# Allegro board sensor_board_place_repl.brd
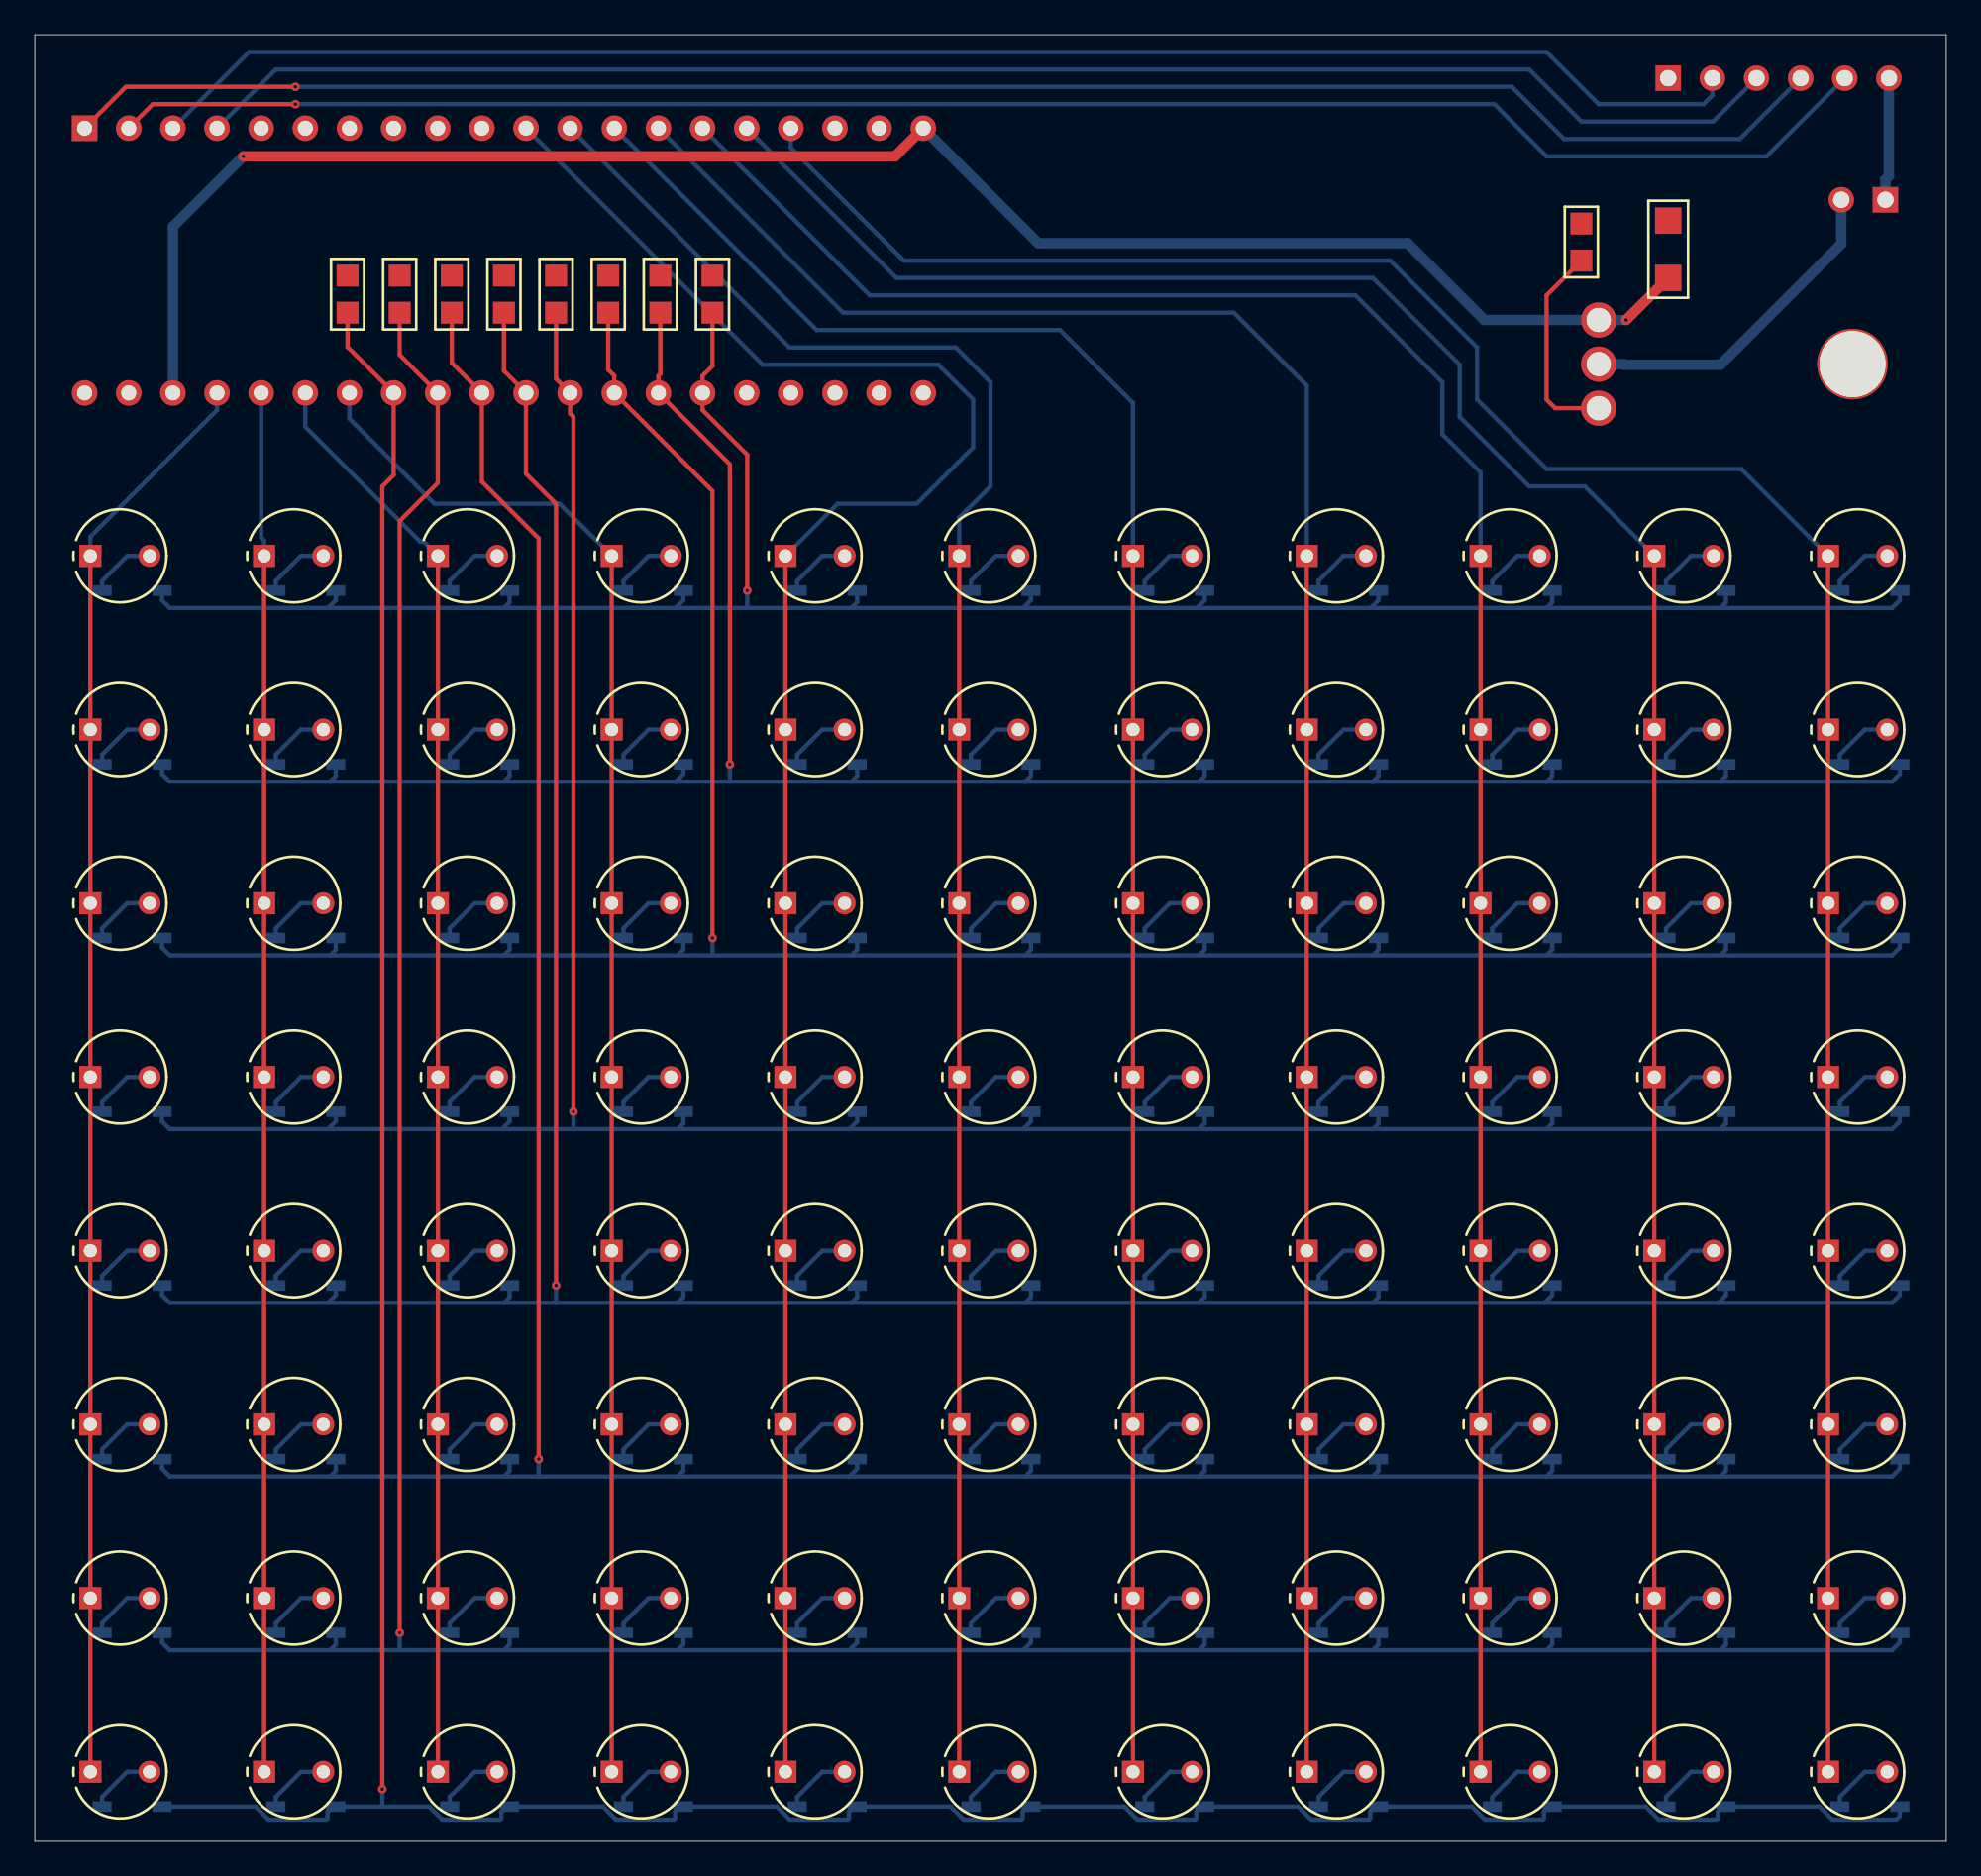
[diagram p0: board, top side]
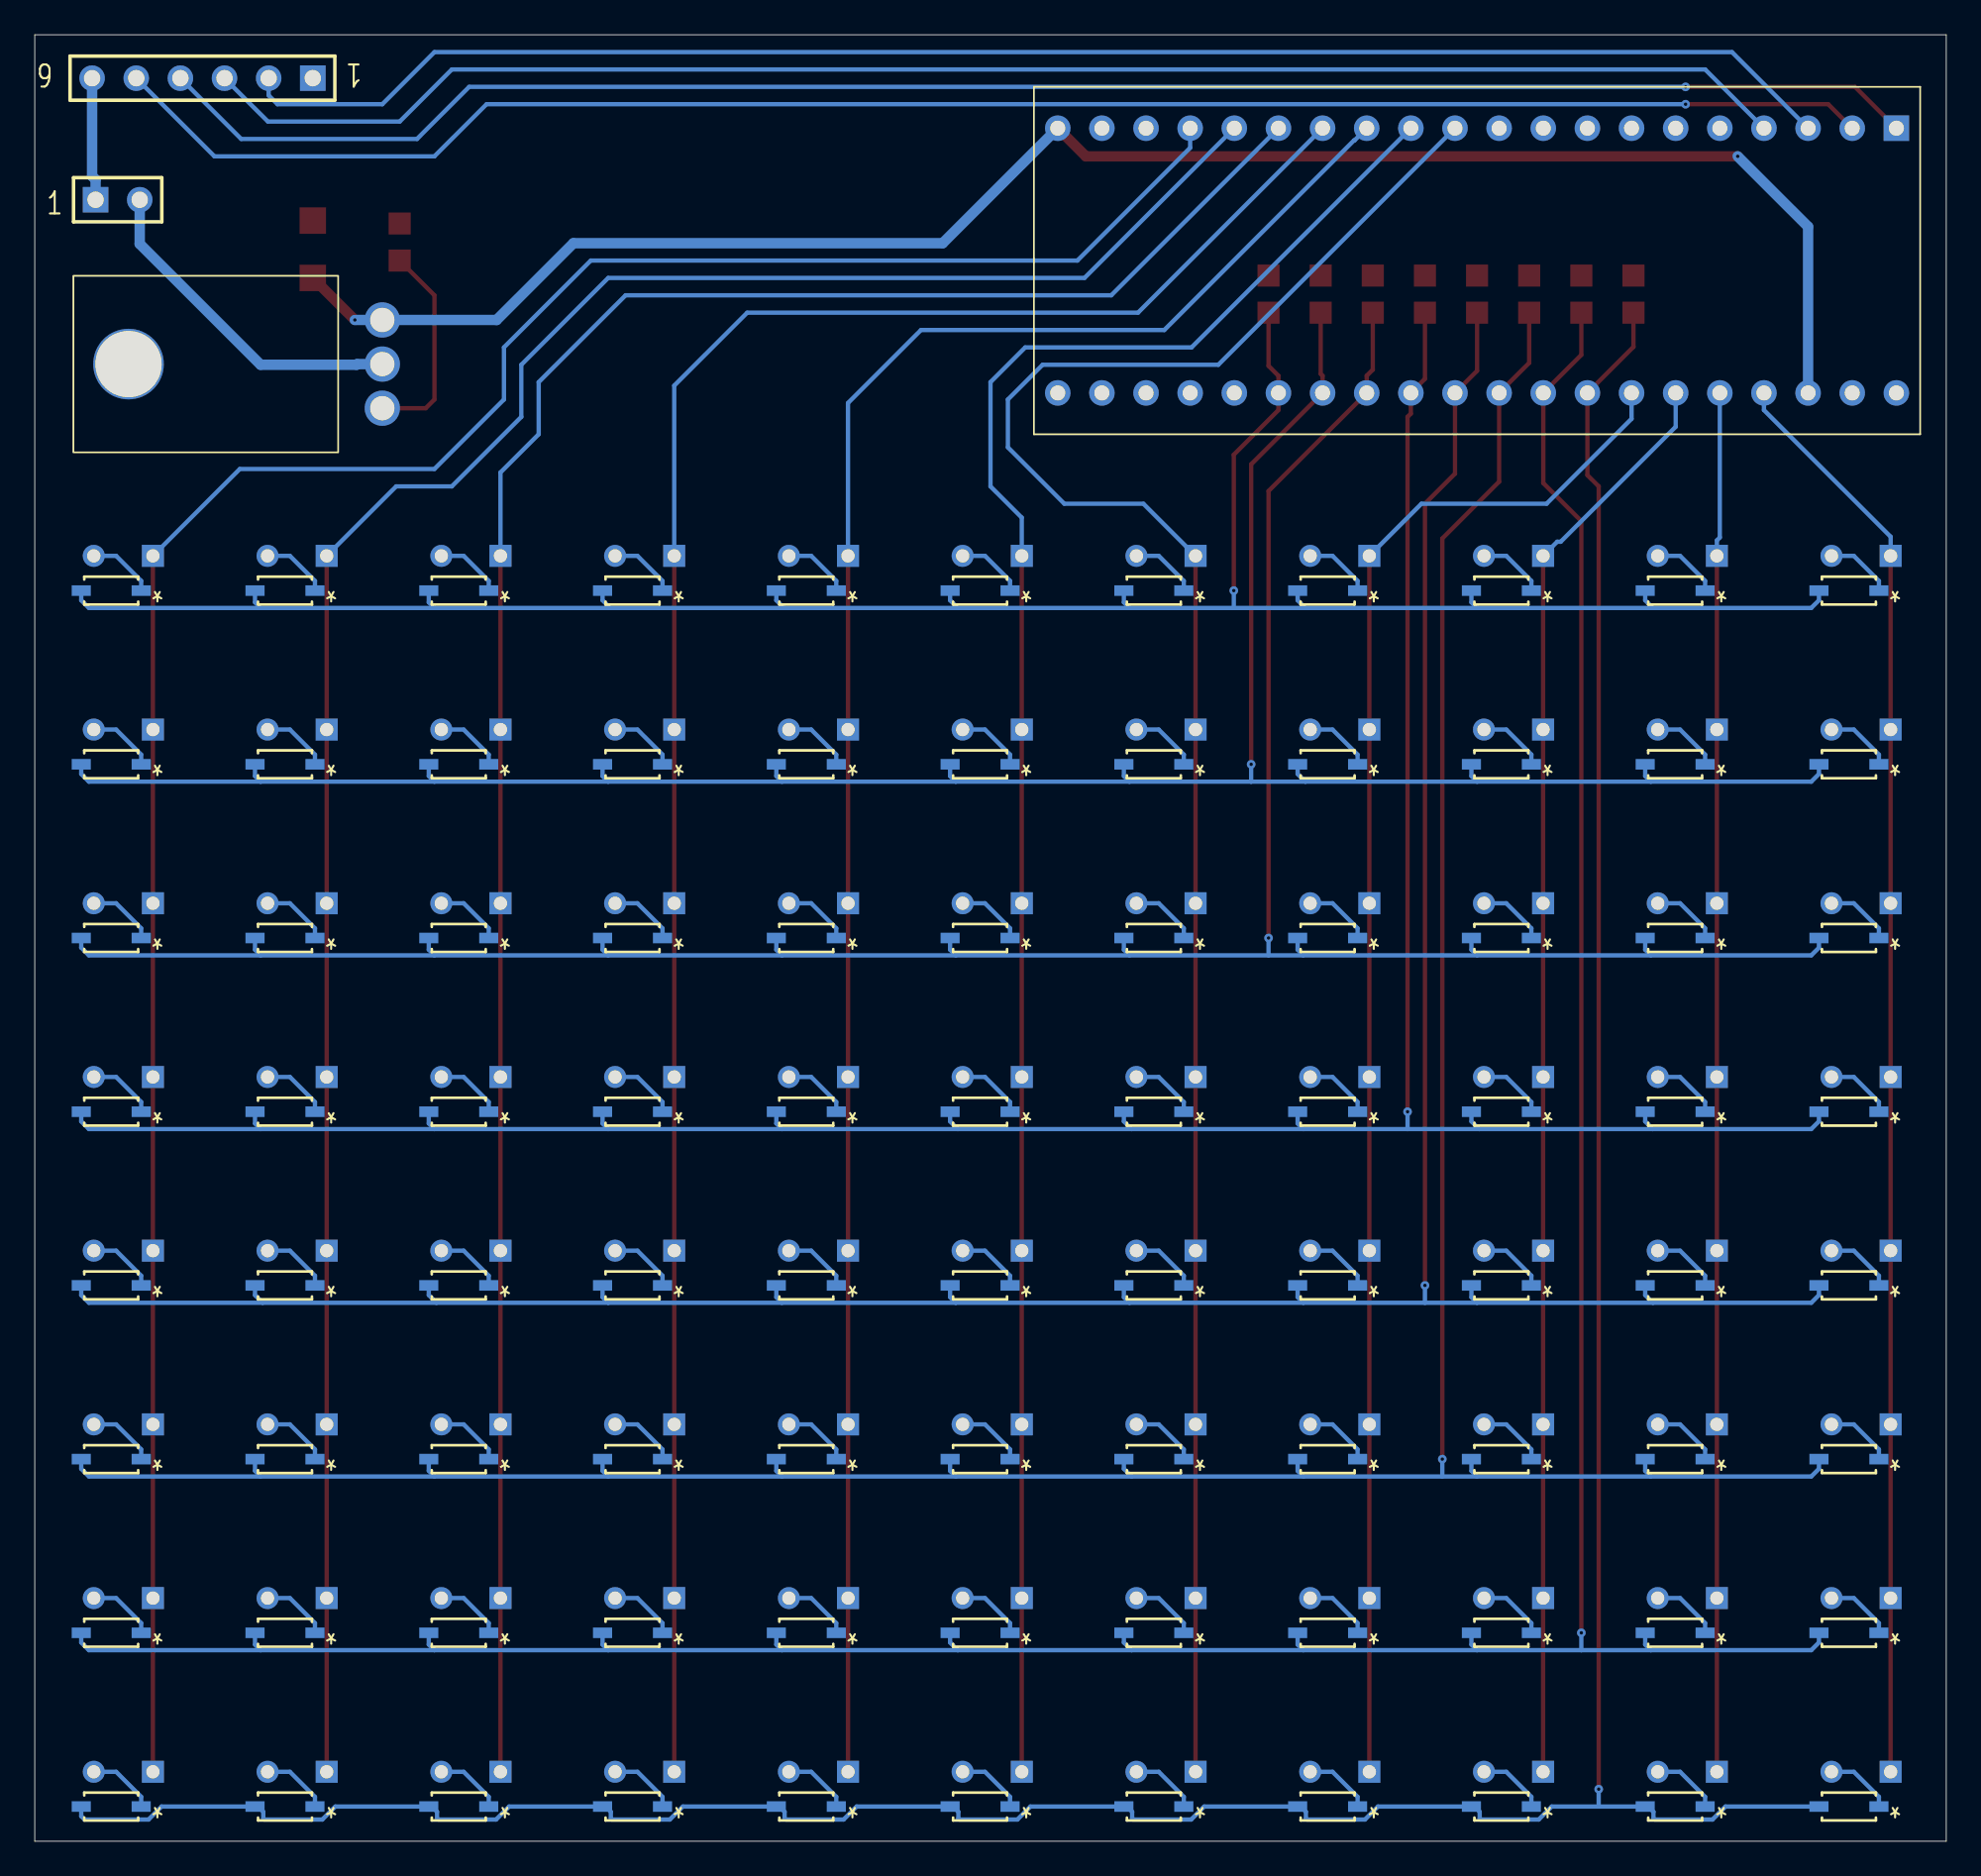
[diagram p1: board, bottom side, seen from below]

Outline 110 x 104 mm; copper layers: TOP, BOTTOM. Coordinates in mm from the lower left corner of the outline.
Outline path: 0,104 0,0 110,0 110,104 0,104

## Design rules (mm)
constraint set DEFAULT: min track width 0.1

## Placement (name value [footprint] x y rotation side)
C1  1uF  [SMC1206]  94 90 90 top
D1  D1N4148  [SOD123_DIO]  5.6 72 0 bottom
D2  D1N4148  [SOD123_DIO]  15.6 72 0 bottom
D3  D1N4148  [SOD123_DIO]  25.6 72 0 bottom
D4  D1N4148  [SOD123_DIO]  35.6 72 0 bottom
D5  D1N4148  [SOD123_DIO]  45.6 72 0 bottom
D6  D1N4148  [SOD123_DIO]  55.6 72 0 bottom
D7  D1N4148  [SOD123_DIO]  65.6 72 0 bottom
D8  D1N4148  [SOD123_DIO]  75.6 72 0 bottom
D9  D1N4148  [SOD123_DIO]  85.6 72 0 bottom
D10  D1N4148  [SOD123_DIO]  95.6 72 0 bottom
D11  D1N4148  [SOD123_DIO]  105.6 72 0 bottom
D12  D1N4148  [SOD123_DIO]  5.6 62 0 bottom
D13  D1N4148  [SOD123_DIO]  15.6 62 0 bottom
D14  D1N4148  [SOD123_DIO]  25.6 62 0 bottom
D15  D1N4148  [SOD123_DIO]  35.6 62 0 bottom
D16  D1N4148  [SOD123_DIO]  45.6 62 0 bottom
D17  D1N4148  [SOD123_DIO]  55.6 62 0 bottom
D18  D1N4148  [SOD123_DIO]  65.6 62 0 bottom
D19  D1N4148  [SOD123_DIO]  75.6 62 0 bottom
D20  D1N4148  [SOD123_DIO]  85.6 62 0 bottom
D21  D1N4148  [SOD123_DIO]  95.6 62 0 bottom
D22  D1N4148  [SOD123_DIO]  105.6 62 0 bottom
D23  D1N4148  [SOD123_DIO]  5.6 52 0 bottom
D24  D1N4148  [SOD123_DIO]  15.6 52 0 bottom
D25  D1N4148  [SOD123_DIO]  25.6 52 0 bottom
D26  D1N4148  [SOD123_DIO]  35.6 52 0 bottom
D27  D1N4148  [SOD123_DIO]  45.6 52 0 bottom
D28  D1N4148  [SOD123_DIO]  55.6 52 0 bottom
D29  D1N4148  [SOD123_DIO]  65.6 52 0 bottom
D30  D1N4148  [SOD123_DIO]  75.6 52 0 bottom
D31  D1N4148  [SOD123_DIO]  85.6 52 0 bottom
D32  D1N4148  [SOD123_DIO]  95.6 52 0 bottom
D33  D1N4148  [SOD123_DIO]  105.6 52 0 bottom
D34  D1N4148  [SOD123_DIO]  5.6 42 0 bottom
D35  D1N4148  [SOD123_DIO]  15.6 42 0 bottom
D36  D1N4148  [SOD123_DIO]  25.6 42 0 bottom
D37  D1N4148  [SOD123_DIO]  35.6 42 0 bottom
D38  D1N4148  [SOD123_DIO]  45.6 42 0 bottom
D39  D1N4148  [SOD123_DIO]  55.6 42 0 bottom
D40  D1N4148  [SOD123_DIO]  65.6 42 0 bottom
D41  D1N4148  [SOD123_DIO]  75.6 42 0 bottom
D42  D1N4148  [SOD123_DIO]  85.6 42 0 bottom
D43  D1N4148  [SOD123_DIO]  95.6 42 0 bottom
D44  D1N4148  [SOD123_DIO]  105.6 42 0 bottom
D45  D1N4148  [SOD123_DIO]  5.6 32 0 bottom
D46  D1N4148  [SOD123_DIO]  15.6 32 0 bottom
D47  D1N4148  [SOD123_DIO]  25.6 32 0 bottom
D48  D1N4148  [SOD123_DIO]  35.6 32 0 bottom
D49  D1N4148  [SOD123_DIO]  45.6 32 0 bottom
D50  D1N4148  [SOD123_DIO]  55.6 32 0 bottom
D51  D1N4148  [SOD123_DIO]  65.6 32 0 bottom
D52  D1N4148  [SOD123_DIO]  75.6 32 0 bottom
D53  D1N4148  [SOD123_DIO]  85.6 32 0 bottom
D54  D1N4148  [SOD123_DIO]  95.6 32 0 bottom
D55  D1N4148  [SOD123_DIO]  105.6 32 0 bottom
D56  D1N4148  [SOD123_DIO]  5.6 22 0 bottom
D57  D1N4148  [SOD123_DIO]  15.6 22 0 bottom
D58  D1N4148  [SOD123_DIO]  25.6 22 0 bottom
D59  D1N4148  [SOD123_DIO]  35.6 22 0 bottom
D60  D1N4148  [SOD123_DIO]  45.6 22 0 bottom
D61  D1N4148  [SOD123_DIO]  55.6 22 0 bottom
D62  D1N4148  [SOD123_DIO]  65.6 22 0 bottom
D63  D1N4148  [SOD123_DIO]  75.6 22 0 bottom
D64  D1N4148  [SOD123_DIO]  85.6 22 0 bottom
D65  D1N4148  [SOD123_DIO]  95.6 22 0 bottom
D66  D1N4148  [SOD123_DIO]  105.6 22 0 bottom
D67  D1N4148  [SOD123_DIO]  5.6 12 0 bottom
D68  D1N4148  [SOD123_DIO]  15.6 12 0 bottom
D69  D1N4148  [SOD123_DIO]  25.6 12 0 bottom
D70  D1N4148  [SOD123_DIO]  35.6 12 0 bottom
D71  D1N4148  [SOD123_DIO]  45.6 12 0 bottom
D72  D1N4148  [SOD123_DIO]  55.6 12 0 bottom
D73  D1N4148  [SOD123_DIO]  65.6 12 0 bottom
D74  D1N4148  [SOD123_DIO]  75.6 12 0 bottom
D75  D1N4148  [SOD123_DIO]  85.6 12 0 bottom
D76  D1N4148  [SOD123_DIO]  95.6 12 0 bottom
D77  D1N4148  [SOD123_DIO]  105.6 12 0 bottom
D78  D1N4148  [SOD123_DIO]  5.6 2 0 bottom
D79  D1N4148  [SOD123_DIO]  15.6 2 0 bottom
D80  D1N4148  [SOD123_DIO]  25.6 2 0 bottom
D81  D1N4148  [SOD123_DIO]  35.6 2 0 bottom
D82  D1N4148  [SOD123_DIO]  45.6 2 0 bottom
D83  D1N4148  [SOD123_DIO]  55.6 2 0 bottom
D84  D1N4148  [SOD123_DIO]  65.6 2 0 bottom
D85  D1N4148  [SOD123_DIO]  75.6 2 0 bottom
D86  D1N4148  [SOD123_DIO]  85.6 2 0 bottom
D87  D1N4148  [SOD123_DIO]  95.6 2 0 bottom
D88  D1N4148  [SOD123_DIO]  105.6 2 0 bottom
J1  CON6  [BLKCON100VHTM1SQW1006]  94 101.5 0 bottom
J2  JUMPER  [BLKCON100VHTM1SQW1002]  106.5 94.5 180 bottom
Q1  IRF9530N/TO220  [TO220ABH]  90 82.5 180 bottom
R1  100  [SMR0805]  89 91 90 top
R2  5k-20k  [LDR1_NTE]  3.2 74 0 top
R3  5k-20k  [LDR1_NTE]  13.2 74 0 top
R4  5k-20k  [LDR1_NTE]  23.2 74 0 top
R5  5k-20k  [LDR1_NTE]  33.2 74 0 top
R6  5k-20k  [LDR1_NTE]  43.2 74 0 top
R7  5k-20k  [LDR1_NTE]  53.2 74 0 top
R8  5k-20k  [LDR1_NTE]  63.2 74 0 top
R9  5k-20k  [LDR1_NTE]  73.2 74 0 top
R10  5k-20k  [LDR1_NTE]  83.2 74 0 top
R11  5k-20k  [LDR1_NTE]  93.2 74 0 top
R12  5k-20k  [LDR1_NTE]  103.2 74 0 top
R13  5k-20k  [LDR1_NTE]  3.2 64 0 top
R14  5k-20k  [LDR1_NTE]  13.2 64 0 top
R15  5k-20k  [LDR1_NTE]  23.2 64 0 top
R16  5k-20k  [LDR1_NTE]  33.2 64 0 top
R17  5k-20k  [LDR1_NTE]  43.2 64 0 top
R18  5k-20k  [LDR1_NTE]  53.2 64 0 top
R19  5k-20k  [LDR1_NTE]  63.2 64 0 top
R20  5k-20k  [LDR1_NTE]  73.2 64 0 top
R21  5k-20k  [LDR1_NTE]  83.2 64 0 top
R22  5k-20k  [LDR1_NTE]  93.2 64 0 top
R23  5k-20k  [LDR1_NTE]  103.2 64 0 top
R24  5k-20k  [LDR1_NTE]  3.2 54 0 top
R25  5k-20k  [LDR1_NTE]  13.2 54 0 top
R26  5k-20k  [LDR1_NTE]  23.2 54 0 top
R27  5k-20k  [LDR1_NTE]  33.2 54 0 top
R28  5k-20k  [LDR1_NTE]  43.2 54 0 top
R29  5k-20k  [LDR1_NTE]  53.2 54 0 top
R30  5k-20k  [LDR1_NTE]  63.2 54 0 top
R31  5k-20k  [LDR1_NTE]  73.2 54 0 top
R32  5k-20k  [LDR1_NTE]  83.2 54 0 top
R33  5k-20k  [LDR1_NTE]  93.2 54 0 top
R34  5k-20k  [LDR1_NTE]  103.2 54 0 top
R35  5k-20k  [LDR1_NTE]  3.2 44 0 top
R36  5k-20k  [LDR1_NTE]  13.2 44 0 top
R37  5k-20k  [LDR1_NTE]  23.2 44 0 top
R38  5k-20k  [LDR1_NTE]  33.2 44 0 top
R39  5k-20k  [LDR1_NTE]  43.2 44 0 top
R40  5k-20k  [LDR1_NTE]  53.2 44 0 top
R41  5k-20k  [LDR1_NTE]  63.2 44 0 top
R42  5k-20k  [LDR1_NTE]  73.2 44 0 top
R43  5k-20k  [LDR1_NTE]  83.2 44 0 top
R44  5k-20k  [LDR1_NTE]  93.2 44 0 top
R45  5k-20k  [LDR1_NTE]  103.2 44 0 top
R46  5k-20k  [LDR1_NTE]  3.2 34 0 top
R47  5k-20k  [LDR1_NTE]  13.2 34 0 top
R48  5k-20k  [LDR1_NTE]  23.2 34 0 top
R49  5k-20k  [LDR1_NTE]  33.2 34 0 top
R50  5k-20k  [LDR1_NTE]  43.2 34 0 top
R51  5k-20k  [LDR1_NTE]  53.2 34 0 top
R52  5k-20k  [LDR1_NTE]  63.2 34 0 top
R53  5k-20k  [LDR1_NTE]  73.2 34 0 top
R54  5k-20k  [LDR1_NTE]  83.2 34 0 top
R55  5k-20k  [LDR1_NTE]  93.2 34 0 top
R56  5k-20k  [LDR1_NTE]  103.2 34 0 top
R57  5k-20k  [LDR1_NTE]  3.2 24 0 top
R58  5k-20k  [LDR1_NTE]  13.2 24 0 top
R59  5k-20k  [LDR1_NTE]  23.2 24 0 top
R60  5k-20k  [LDR1_NTE]  33.2 24 0 top
R61  5k-20k  [LDR1_NTE]  43.2 24 0 top
R62  5k-20k  [LDR1_NTE]  53.2 24 0 top
R63  5k-20k  [LDR1_NTE]  63.2 24 0 top
R64  5k-20k  [LDR1_NTE]  73.2 24 0 top
R65  5k-20k  [LDR1_NTE]  83.2 24 0 top
R66  5k-20k  [LDR1_NTE]  93.2 24 0 top
R67  5k-20k  [LDR1_NTE]  103.2 24 0 top
R68  5k-20k  [LDR1_NTE]  3.2 14 0 top
R69  5k-20k  [LDR1_NTE]  13.2 14 0 top
R70  5k-20k  [LDR1_NTE]  23.2 14 0 top
R71  5k-20k  [LDR1_NTE]  33.2 14 0 top
R72  5k-20k  [LDR1_NTE]  43.2 14 0 top
R73  5k-20k  [LDR1_NTE]  53.2 14 0 top
R74  5k-20k  [LDR1_NTE]  63.2 14 0 top
R75  5k-20k  [LDR1_NTE]  73.2 14 0 top
R76  5k-20k  [LDR1_NTE]  83.2 14 0 top
R77  5k-20k  [LDR1_NTE]  93.2 14 0 top
R78  5k-20k  [LDR1_NTE]  103.2 14 0 top
R79  5k-20k  [LDR1_NTE]  3.2 4 0 top
R80  5k-20k  [LDR1_NTE]  13.2 4 0 top
R81  5k-20k  [LDR1_NTE]  23.2 4 0 top
R82  5k-20k  [LDR1_NTE]  33.2 4 0 top
R83  5k-20k  [LDR1_NTE]  43.2 4 0 top
R84  5k-20k  [LDR1_NTE]  53.2 4 0 top
R85  5k-20k  [LDR1_NTE]  63.2 4 0 top
R86  5k-20k  [LDR1_NTE]  73.2 4 0 top
R87  5k-20k  [LDR1_NTE]  83.2 4 0 top
R88  5k-20k  [LDR1_NTE]  93.2 4 0 top
R89  5k-20k  [LDR1_NTE]  103.2 4 0 top
R90  1k  [SMR0805]  39 88 90 top
R91  1k  [SMR0805]  36 88 90 top
R92  1k  [SMR0805]  33 88 90 top
R93  1k  [SMR0805]  30 88 90 top
R94  1k  [SMR0805]  27 88 90 top
R95  1k  [SMR0805]  24 88 90 top
R96  1k  [SMR0805]  21 88 90 top
R97  1k  [SMR0805]  18 88 90 top
U1  STM32F411  [BLACKPILL_FOOTPRINT]  27 91 270 bottom

## Library data of the parts
C1 = CAP NP
D1-D88 = 1N4148: User Part Number: PN; Tolerance: TOL
J1 = CON6
J2 = JUMPER
Q1 = IRF9530N/TO_0
R1 R90-R97 = R
R2-R89 = LDR: User Part Number: PN; Tolerance: TOL
U1 = STM32_Bluepill

## Footprints (pads in the part's own frame, mm; a bottom-side part is the same pattern mirrored in y, then rotated)
BLACKPILL_FOOTPRINT
  rect 1.473x1.473 hole 0.864: 1(-7.62,24.13)
  round 1.473 hole 0.864: 2(-7.62,21.59) 3(-7.62,19.05) 4(-7.62,16.51) 5(-7.62,13.97) 6(-7.62,11.43) 7(-7.62,8.89) 8(-7.62,6.35) 9(-7.62,3.81) 10(-7.62,1.27) 11(-7.62,-1.27) 12(-7.62,-3.81) 13(-7.62,-6.35) 14(-7.62,-8.89) 15(-7.62,-11.43) 16(-7.62,-13.97) 17(-7.62,-16.51) 18(-7.62,-19.05) 19(-7.62,-21.59) 20(-7.62,-24.13) 21(7.62,-24.13) 22(7.62,-21.59) 23(7.62,-19.05) 24(7.62,-16.51) 25(7.62,-13.97) 26(7.62,-11.43) 27(7.62,-8.89) 28(7.62,-6.35) 29(7.62,-3.81) 30(7.62,-1.27) 31(7.62,1.27) 32(7.62,3.81) 33(7.62,6.35) 34(7.62,8.89) 35(7.62,11.43) 36(7.62,13.97) 37(7.62,16.51) 38(7.62,19.05) 39(7.62,21.59) 40(7.62,24.13)
BLKCON100VHTM1SQW1002
  rect 1.473x1.473 hole 0.94: 1(0,0)
  round 1.473 hole 0.94: 2(2.54,0)
BLKCON100VHTM1SQW1006
  rect 1.473x1.473 hole 0.94: 1(0,0)
  round 1.473 hole 0.94: 2(2.54,0) 3(5.08,0) 4(7.62,0) 5(10.16,0) 6(12.7,0)
LDR1_NTE
  rect 1.27x1.27 hole 0.762: 1(0,0)
  round 1.27 hole 0.762: 2(3.404,0)
SMC1206
  rect 1.524x1.524 smd: 1(0,0) 2(3.302,0)
SMR0805
  rect 1.27x1.27 smd: 1(0,0) 2(2.134,0)
SOD123_DIO
  rect 1.1x0.61 smd: 1(-1.725,0) 2(1.725,0)
TO220ABH
  round 2.032 hole 1.397: 1(0,0) 2(0,2.54) 3(0,5.08)
  round 4.064 hole 3.81: 4(-14.605,2.54)

## Nets
3V3: C1.1 Q1.3(S) U1.20 U1.38
GND: C1.2 J1.1 R1.2 R90.2 R91.2 R92.2 R93.2 R94.2 R95.2 R96.2 R97.2 U1.19 U1.39
VIN_5V: U1.18 U1.40(VIN_5V#40)
ADC0: D1.2 D2.2 D3.2 D4.2 D5.2 D6.2 D7.2 D8.2 D9.2 D10.2 D11.2 R90.1 U1.26
ADC1: D12.2 D13.2 D14.2 D15.2 D16.2 D17.2 D18.2 D19.2 D20.2 D21.2 D22.2 R91.1 U1.27
ADC2: D23.2 D24.2 D25.2 D26.2 D27.2 D28.2 D29.2 D30.2 D31.2 D32.2 D33.2 R92.1 U1.28
ADC3: D34.2 D35.2 D36.2 D37.2 D38.2 D39.2 D40.2 D41.2 D42.2 D43.2 D44.2 R93.1 U1.29
ADC4: D45.2 D46.2 D47.2 D48.2 D49.2 D50.2 D51.2 D52.2 D53.2 D54.2 D55.2 R94.1 U1.30
ADC5: D56.2 D57.2 D58.2 D59.2 D60.2 D61.2 D62.2 D63.2 D64.2 D65.2 D66.2 R95.1 U1.31
ADC6: D67.2 D68.2 D69.2 D70.2 D71.2 D72.2 D73.2 D74.2 D75.2 D76.2 D77.2 R96.1 U1.32
ADC7: D78.2 D79.2 D80.2 D81.2 D82.2 D83.2 D84.2 D85.2 D86.2 D87.2 D88.2 R97.1 U1.33
COL_SELECT_0: R2.1 R13.1 R24.1 R35.1 R46.1 R57.1 R68.1 R79.1 U1.37
COL_SELECT_1: R3.1 R14.1 R25.1 R36.1 R47.1 R58.1 R69.1 R80.1 U1.36
COL_SELECT_2: R4.1 R15.1 R26.1 R37.1 R48.1 R59.1 R70.1 R81.1 U1.35
COL_SELECT_3: R5.1 R16.1 R27.1 R38.1 R49.1 R60.1 R71.1 R82.1 U1.34
COL_SELECT_4: R6.1 R17.1 R28.1 R39.1 R50.1 R61.1 R72.1 R83.1 U1.11
COL_SELECT_5: R7.1 R18.1 R29.1 R40.1 R51.1 R62.1 R73.1 R84.1 U1.12
COL_SELECT_6: R8.1 R19.1 R30.1 R41.1 R52.1 R63.1 R74.1 R85.1 U1.13
COL_SELECT_7: R9.1 R20.1 R31.1 R42.1 R53.1 R64.1 R75.1 R86.1 U1.14
COL_SELECT_8: R10.1 R21.1 R32.1 R43.1 R54.1 R65.1 R76.1 R87.1 U1.15
COL_SELECT_9: R11.1 R22.1 R33.1 R44.1 R55.1 R66.1 R77.1 R88.1 U1.16
COL_SELECT_10: R12.1 R23.1 R34.1 R45.1 R56.1 R67.1 R78.1 R89.1 U1.17
MISO: J1.2 U1.3
MOSI: J1.3 U1.4
N00105_M_COL1_R-D: D11.1 R12.2
N00105_M_COL1_R-D1: D22.1 R23.2
N00105_M_COL1_R-D2: D33.1 R34.2
N00105_M_COL1_R-D3: D44.1 R45.2
N00105_M_COL1_R-D4: D55.1 R56.2
N00105_M_COL1_R-D5: D66.1 R67.2
N00105_M_COL1_R-D6: D77.1 R78.2
N00105_M_COL1_R-D7: D88.1 R89.2
N00105_M_COL12_R-D: D2.1 R3.2
N00105_M_COL12_R-D1: D13.1 R14.2
N00105_M_COL12_R-D2: D24.1 R25.2
N00105_M_COL12_R-D3: D35.1 R36.2
N00105_M_COL12_R-D4: D46.1 R47.2
N00105_M_COL12_R-D5: D57.1 R58.2
N00105_M_COL12_R-D6: D68.1 R69.2
N00105_M_COL12_R-D7: D79.1 R80.2
N00105_M_COL13_R-D: D3.1 R4.2
N00105_M_COL13_R-D1: D14.1 R15.2
N00105_M_COL13_R-D2: D25.1 R26.2
N00105_M_COL13_R-D3: D36.1 R37.2
N00105_M_COL13_R-D4: D47.1 R48.2
N00105_M_COL13_R-D5: D58.1 R59.2
N00105_M_COL13_R-D6: D69.1 R70.2
N00105_M_COL13_R-D7: D80.1 R81.2
N00105_M_COL14_R-D: D4.1 R5.2
N00105_M_COL14_R-D1: D15.1 R16.2
N00105_M_COL14_R-D2: D26.1 R27.2
N00105_M_COL14_R-D3: D37.1 R38.2
N00105_M_COL14_R-D4: D48.1 R49.2
N00105_M_COL14_R-D5: D59.1 R60.2
N00105_M_COL14_R-D6: D70.1 R71.2
N00105_M_COL14_R-D7: D81.1 R82.2
N00105_M_COL15_R-D: D5.1 R6.2
N00105_M_COL15_R-D1: D16.1 R17.2
N00105_M_COL15_R-D2: D27.1 R28.2
N00105_M_COL15_R-D3: D38.1 R39.2
N00105_M_COL15_R-D4: D49.1 R50.2
N00105_M_COL15_R-D5: D60.1 R61.2
N00105_M_COL15_R-D6: D71.1 R72.2
N00105_M_COL15_R-D7: D82.1 R83.2
N00105_M_COL16_R-D: D6.1 R7.2
N00105_M_COL16_R-D1: D17.1 R18.2
N00105_M_COL16_R-D2: D28.1 R29.2
N00105_M_COL16_R-D3: D39.1 R40.2
N00105_M_COL16_R-D4: D50.1 R51.2
N00105_M_COL16_R-D5: D61.1 R62.2
N00105_M_COL16_R-D6: D72.1 R73.2
N00105_M_COL16_R-D7: D83.1 R84.2
N00105_M_COL17_R-D: D7.1 R8.2
N00105_M_COL17_R-D1: D18.1 R19.2
N00105_M_COL17_R-D2: D29.1 R30.2
N00105_M_COL17_R-D3: D40.1 R41.2
N00105_M_COL17_R-D4: D51.1 R52.2
N00105_M_COL17_R-D5: D62.1 R63.2
N00105_M_COL17_R-D6: D73.1 R74.2
N00105_M_COL17_R-D7: D84.1 R85.2
N00105_M_COL18_R-D: D8.1 R9.2
N00105_M_COL18_R-D1: D19.1 R20.2
N00105_M_COL18_R-D2: D30.1 R31.2
N00105_M_COL18_R-D3: D41.1 R42.2
N00105_M_COL18_R-D4: D52.1 R53.2
N00105_M_COL18_R-D5: D63.1 R64.2
N00105_M_COL18_R-D6: D74.1 R75.2
N00105_M_COL18_R-D7: D85.1 R86.2
N00105_M_COL19_R-D: D9.1 R10.2
N00105_M_COL19_R-D1: D20.1 R21.2
N00105_M_COL19_R-D2: D31.1 R32.2
N00105_M_COL19_R-D3: D42.1 R43.2
N00105_M_COL19_R-D4: D53.1 R54.2
N00105_M_COL19_R-D5: D64.1 R65.2
N00105_M_COL19_R-D6: D75.1 R76.2
N00105_M_COL19_R-D7: D86.1 R87.2
N00105_M_COL20_R-D: D10.1 R11.2
N00105_M_COL20_R-D1: D21.1 R22.2
N00105_M_COL20_R-D2: D32.1 R33.2
N00105_M_COL20_R-D3: D43.1 R44.2
N00105_M_COL20_R-D4: D54.1 R55.2
N00105_M_COL20_R-D5: D65.1 R66.2
N00105_M_COL20_R-D6: D76.1 R77.2
N00105_M_COL20_R-D7: D87.1 R88.2
N00105_M_COL_R-D: D1.1 R2.2
N00105_M_COL_R-D1: D12.1 R13.2
N00105_M_COL_R-D2: D23.1 R24.2
N00105_M_COL_R-D3: D34.1 R35.2
N00105_M_COL_R-D4: D45.1 R46.2
N00105_M_COL_R-D5: D56.1 R57.2
N00105_M_COL_R-D6: D67.1 R68.2
N00105_M_COL_R-D7: D78.1 R79.2
NCS: J1.4 U1.1
SCK: J1.5 U1.2
N18545: J2.2 Q1.2
N18549: J1.6 J2.1
N18612: Q1.1 R1.1

Pads without a net: Q1 4; U1 5 6 7 8 9 10 21 22 23 24 25

## Via types
v1: diameter 0.5, hole 0.2, TOP to BOTTOM, 12 vias

## Routing (per net, layer and track width the routed paths; a pad name or vN(x,y) marks a point on that pad's centre or on a via; arc(x,y) is an arc through that point)
3V3: length 103.5
  TOP w0.6: U1.20 49.51,97 v1(12,97) ; v1(91.58,87.58) C1.1
  BOTTOM w0.6: U1.38 7.95,92.95 v1(12,97) ; v1(91.58,87.58) Q1.3 83.42,87.58 79,92 57.75,92 U1.20
ADC0: length 130.2
  TOP w0.25: v1(41,72) 41,79.82 38.43,82.39 U1.26 38.43,84.37 39,84.94 R90.1
  BOTTOM w0.25: 97,71 106.88,71 107.33,71.44 D11.2 ; 97,71 87,71 ; 97,71 97.33,71.33 D10.2 ; D1.2 7.33,71.44 7.77,71 16.88,71 ; 47,71 56.88,71 ; 47,71 41,71 ; 47,71 47.33,71.33 47.33,72 ; 56.88,71 66.88,71 ; 56.88,71 57.33,71.44 D6.2 ; 87,71 76.88,71 ; 87,71 87.33,71.33 87.33,72 ; 76.88,71 77.33,71.44 D8.2 ; 76.88,71 66.88,71 ; 37.33,72 37.33,71.44 36.88,71 ; 41,71 36.88,71 ; 41,71 v1(41,72) ; 66.88,71 67.33,71.44 D7.2 ; 36.88,71 27,71 ; 27,71 27.33,71.33 D3.2 ; 27,71 16.88,71 ; 16.88,71 17.33,71.44 D2.2
ADC1: length 140.5
  TOP w0.25: v1(40,62) 40,79.27 U1.27 35.89,84.37 36,84.48 R91.1
  BOTTOM w0.25: 57,61 57.33,61.33 D17.2 ; 57,61 67,61 ; 57,61 47,61 ; D18.2 67.33,61.33 67,61 ; 67,61 77,61 ; D14.2 27.33,61.33 27,61 ; 37.33,62 37.33,61.44 36.88,61 ; 47,61 47.33,61.33 47.33,62 ; 47,61 40,61 ; 27,61 17,61 ; 27,61 36.88,61 ; 17,61 7.77,61 7.33,61.44 D12.2 ; 17,61 17.33,61.33 D13.2 ; D21.2 97.33,61.33 97,61 ; 36.88,61 40,61 ; 40,61 v1(40,62) ; 97,61 106.88,61 107.33,61.44 D22.2 ; 97,61 87,61 ; D19.2 77.33,61.33 77,61 ; 77,61 87,61 ; 87.33,62 87.33,61.33 87,61
ADC2: length 151.2
  TOP w0.25: v1(39,52) 39,77.73 U1.28 33.35,84.37 33,84.72 R92.1
  BOTTOM w0.25: 27,51 17,51 ; 27,51 37,51 ; 27,51 27.33,51.33 D25.2 ; 17,51 7.77,51 7.33,51.44 D23.2 ; 17,51 17.33,51.33 D24.2 ; 57,51 47,51 ; 57,51 57.33,51.33 D28.2 ; 57,51 67,51 ; 47,51 47.33,51.33 47.33,52 ; 47,51 39,51 ; 67,51 67.33,51.33 D29.2 ; 67,51 77,51 ; 87.33,52 87.33,51.33 87,51 ; 97,51 97.33,51.33 D32.2 ; 97,51 106.88,51 107.33,51.44 D33.2 ; 97,51 87,51 ; 37,51 37.33,51.33 37.33,52 ; 37,51 39,51 ; 39,51 v1(39,52) ; 87,51 77,51 ; 77,51 77.33,51.33 D30.2
ADC3: length 159.3
  TOP w0.25: v1(31,42) 31,82 30.81,82.19 U1.29 30,84.19 R93.1
  BOTTOM w0.25: D41.2 77.33,41.33 77,41 ; 31,41 v1(31,42) ; 31,41 37,41 ; 31,41 26.88,41 ; 37,41 37.33,41.33 37.33,42 ; 37,41 46.88,41 ; D39.2 57.33,41.44 56.88,41 ; 77,41 67,41 ; 77,41 87,41 ; 67,41 67.33,41.33 D40.2 ; 67,41 56.88,41 ; 87.33,42 87.33,41.33 87,41 ; 46.88,41 47.33,41.44 47.33,42 ; 46.88,41 56.88,41 ; 87,41 97,41 ; 97,41 106.88,41 107.33,41.44 D44.2 ; 97,41 97.33,41.33 D43.2 ; 26.88,41 16.88,41 ; 26.88,41 27.33,41.44 D36.2 ; 16.88,41 7.77,41 7.33,41.44 D34.2 ; 16.88,41 17.33,41.44 D35.2
ADC4: length 170.1
  TOP w0.25: v1(30,32) 30,77 28.27,78.73 U1.30 27,84.65 R94.1
  BOTTOM w0.25: D47.2 27.33,31.33 27,31 ; 37,31 30,31 ; 37,31 47,31 ; 37,31 37.33,31.33 37.33,32 ; 30,31 27,31 ; 30,31 v1(30,32) ; 27,31 16.88,31 ; D46.2 17.33,31.44 16.88,31 ; D55.2 107.33,31.44 106.88,31 96.88,31 ; 47,31 47.33,31.33 47.33,32 ; 47,31 57,31 ; D52.2 77.33,31.33 77,31 ; 96.88,31 86.88,31 ; 96.88,31 97.33,31.44 D54.2 ; 86.88,31 87.33,31.44 87.33,32 ; 86.88,31 77,31 ; D51.2 67.33,31.33 67,31 ; D45.2 7.33,31.44 7.77,31 16.88,31 ; 57,31 57.33,31.33 D50.2 ; 57,31 67,31 ; 77,31 67,31
ADC5: length 180.8
  TOP w0.25: R95.1 24,85.11 U1.31 25.73,78.27 29,75 v1(29,22)
  BOTTOM w0.25: 97,21 106.88,21 107.33,21.44 D66.2 ; 97,21 97.33,21.33 D65.2 ; 97,21 87,21 ; 17,21 17.33,21.33 D57.2 ; 17,21 7.77,21 7.33,21.44 D56.2 ; 17,21 27,21 ; v1(29,22) 29,21 ; 29,21 27,21 ; 29,21 37,21 ; 67,21 67.33,21.33 D62.2 ; 67,21 57,21 ; 67,21 77,21 ; 37,21 37.33,21.33 37.33,22 ; 37,21 46.88,21 ; 87,21 77,21 ; 87,21 87.33,21.33 87.33,22 ; 77,21 77.33,21.33 D63.2 ; 57,21 46.88,21 ; 57,21 57.33,21.33 D61.2 ; 47.33,22 47.33,21.44 46.88,21 ; 27,21 27.33,21.33 D58.2
ADC6: length 190.6
  TOP w0.25: R96.1 21,85.57 U1.32 23.19,78.19 21,76 v1(21,12)
  BOTTOM w0.25: D67.2 7.33,11.44 7.77,11 17,11 ; 46.88,11 37,11 ; 46.88,11 47.33,11.44 47.33,12 ; 46.88,11 56.88,11 ; 37,11 37.33,11.33 37.33,12 ; 37,11 27,11 ; 87,11 87.33,11.33 87.33,12 ; 87,11 97,11 ; 87,11 77,11 ; 77,11 77.33,11.33 D74.2 ; 77,11 67,11 ; 97,11 97.33,11.33 D76.2 ; 97,11 106.88,11 107.33,11.44 D77.2 ; 27,11 27.33,11.33 D69.2 ; 27,11 21,11 ; 17,11 17.33,11.33 D68.2 ; 17,11 21,11 ; 21,11 v1(21,12) ; D72.2 57.33,11.44 56.88,11 ; 56.88,11 67,11 ; 67,11 67.33,11.33 D73.2
ADC7: length 195.9
  TOP w0.25: v1(20,3) 20,78 20.65,78.65 U1.33 18,86.03 R97.1
  BOTTOM w0.25: v1(20,3) 20,2 ; 20,2 22.7,2 23.45,1.25 26.78,1.25 26.85,1.32 26.85,1.7 27.15,2 D80.2 32.7,2 33.45,1.25 36.78,1.25 36.85,1.32 36.85,1.7 37.15,2 42.7,2 43.45,1.25 46.78,1.25 46.85,1.32 46.85,1.7 47.15,2 52.7,2 53.45,1.25 56.78,1.25 56.85,1.32 56.85,1.7 57.15,2 D83.2 62.7,2 63.45,1.25 66.78,1.25 66.85,1.32 66.85,1.7 67.15,2 D84.2 72.7,2 73.45,1.25 76.78,1.25 76.85,1.32 76.85,1.7 77.15,2 D85.2 82.7,2 83.45,1.25 86.78,1.25 86.85,1.32 86.85,1.7 87.15,2 92.7,2 93.45,1.25 96.78,1.25 96.85,1.32 96.85,1.7 97.15,2 D87.2 102.7,2 103.45,1.25 107.13,1.25 107.33,1.44 D88.2 ; 20,2 D79.2 17.15,2 16.85,1.7 16.85,1.32 16.78,1.25 13.45,1.25 12.7,2 D78.2
COL_SELECT_0: length 82.4
  TOP w0.25: R79.1 R68.1 R57.1 R46.1 R35.1 R24.1 R13.1 R2.1
  BOTTOM w0.25: R2.1 3.2,75.1 10.49,82.39 U1.37
COL_SELECT_1: length 79.5
  TOP w0.25: R80.1 R69.1 R58.1 R47.1 R36.1 R25.1 R14.1 R3.1
  BOTTOM w0.25: R3.1 13.2,74.89 13.03,75.06 U1.36
COL_SELECT_2: length 82.7
  TOP w0.25: R4.1 R15.1 R26.1 R37.1 R48.1 R59.1 R70.1 R81.1
  BOTTOM w0.25: U1.35 15.57,81.43 22.19,74.81 22.39,74.81 R4.1
COL_SELECT_3: length 89.8
  TOP w0.25: R82.1 R71.1 R60.1 R49.1 R38.1 R27.1 R16.1 R5.1
  BOTTOM w0.25: R5.1 30.2,77 23,77 18.11,81.89 U1.34
COL_SELECT_4: length 118.3
  TOP w0.25: R83.1 R72.1 R61.1 R50.1 R39.1 R28.1 R17.1 R6.1
  BOTTOM w0.25: R6.1 46.2,77 50.75,77 54,80.25 54,83 52,85 41.89,85 U1.11
COL_SELECT_5: length 111
  TOP w0.25: R84.1 R73.1 R62.1 R51.1 R40.1 R29.1 R18.1 R7.1
  BOTTOM w0.25: U1.12 43.43,86 53,86 55,84 55,78 53.2,76.2 R7.1
COL_SELECT_6: length 115.2
  TOP w0.25: R8.1 R19.1 R30.1 R41.1 R52.1 R63.1 R74.1 R85.1
  BOTTOM w0.25: U1.13 34.05,97.92 34.08,97.92 45,87 59,87 63.2,82.8 R8.1
COL_SELECT_7: length 123.2
  TOP w0.25: R9.1 R20.1 R31.1 R42.1 R53.1 R64.1 R75.1 R86.1
  BOTTOM w0.25: R9.1 73.2,83.8 69,88 46.51,88 U1.14
COL_SELECT_8: length 129.5
  TOP w0.25: R87.1 R76.1 R65.1 R54.1 R43.1 R32.1 R21.1 R10.1
  BOTTOM w0.25: U1.15 48.05,89 76,89 81,84 81,81 83.2,78.8 R10.1
COL_SELECT_9: length 134.2
  TOP w0.25: R88.1 R77.1 R66.1 R55.1 R44.1 R33.1 R22.1 R11.1
  BOTTOM w0.25: U1.16 49.59,90 77,90 82,85 82,82 86,78 89.2,78 R11.1
COL_SELECT_10: length 142.3
  TOP w0.25: R89.1 R78.1 R67.1 R56.1 R45.1 R34.1 R23.1 R12.1
  BOTTOM w0.25: U1.17 43.51,97.49 50,91 78,91 83,86 83,83 87,79 98.2,79 R12.1
MISO: length 92.8
  BOTTOM w0.25: U1.3 12.33,103 87,103 90,100 96.03,100 96.54,100.51 J1.2
MOSI: length 92.3
  BOTTOM w0.25: J1.3 96.58,99 89,99 86,102 13.87,102 U1.4
N00105_M_COL1_R-D: length 3.9
  BOTTOM w0.25: R12.2 105.32,74 103.88,72.56 D11.1
N00105_M_COL1_R-D1: length 3.9
  BOTTOM w0.25: R23.2 105.32,64 103.88,62.56 D22.1
N00105_M_COL1_R-D2: length 3.9
  BOTTOM w0.25: R34.2 105.32,54 103.88,52.56 D33.1
N00105_M_COL1_R-D3: length 3.9
  BOTTOM w0.25: R45.2 105.32,44 103.88,42.56 D44.1
N00105_M_COL1_R-D4: length 3.9
  BOTTOM w0.25: D55.1 103.88,32.56 105.32,34 R56.2
N00105_M_COL1_R-D5: length 3.9
  BOTTOM w0.25: D66.1 103.88,22.56 105.32,24 R67.2
N00105_M_COL1_R-D6: length 3.9
  BOTTOM w0.25: D77.1 103.88,12.56 105.32,14 R78.2
N00105_M_COL1_R-D7: length 3.9
  BOTTOM w0.25: D88.1 103.88,2.56 105.32,4 R89.2
N00105_M_COL12_R-D: length 3.9
  BOTTOM w0.25: D2.1 13.88,72.56 15.32,74 R3.2
N00105_M_COL12_R-D1: length 3.9
  BOTTOM w0.25: R14.2 15.32,64 13.88,62.56 D13.1
N00105_M_COL12_R-D2: length 3.9
  BOTTOM w0.25: D24.1 13.88,52.56 15.32,54 R25.2
N00105_M_COL12_R-D3: length 3.9
  BOTTOM w0.25: D35.1 13.88,42.56 15.32,44 R36.2
N00105_M_COL12_R-D4: length 3.9
  BOTTOM w0.25: R47.2 15.32,34 13.88,32.56 D46.1
N00105_M_COL12_R-D5: length 3.9
  BOTTOM w0.25: R58.2 15.32,24 13.88,22.56 D57.1
N00105_M_COL12_R-D6: length 3.9
  BOTTOM w0.25: R69.2 15.32,14 13.88,12.56 D68.1
N00105_M_COL12_R-D7: length 3.9
  BOTTOM w0.25: D79.1 13.88,2.56 15.32,4 R80.2
N00105_M_COL13_R-D: length 3.9
  BOTTOM w0.25: D3.1 23.88,72.56 25.32,74 R4.2
N00105_M_COL13_R-D1: length 3.9
  BOTTOM w0.25: D14.1 23.88,62.56 25.32,64 R15.2
N00105_M_COL13_R-D2: length 3.9
  BOTTOM w0.25: R26.2 25.32,54 23.88,52.56 D25.1
N00105_M_COL13_R-D3: length 3.9
  BOTTOM w0.25: R37.2 25.32,44 23.88,42.56 D36.1
N00105_M_COL13_R-D4: length 3.9
  BOTTOM w0.25: R48.2 25.32,34 23.88,32.56 D47.1
N00105_M_COL13_R-D5: length 3.9
  BOTTOM w0.25: R59.2 25.32,24 23.88,22.56 D58.1
N00105_M_COL13_R-D6: length 3.9
  BOTTOM w0.25: D69.1 23.88,12.56 25.32,14 R70.2
N00105_M_COL13_R-D7: length 3.9
  BOTTOM w0.25: D80.1 23.88,2.56 25.32,4 R81.2
N00105_M_COL14_R-D: length 3.9
  BOTTOM w0.25: R5.2 35.32,74 33.88,72.56 D4.1
N00105_M_COL14_R-D1: length 3.9
  BOTTOM w0.25: R16.2 35.32,64 33.88,62.56 D15.1
N00105_M_COL14_R-D2: length 3.9
  BOTTOM w0.25: R27.2 35.32,54 33.88,52.56 D26.1
N00105_M_COL14_R-D3: length 3.9
  BOTTOM w0.25: R38.2 35.32,44 33.88,42.56 D37.1
N00105_M_COL14_R-D4: length 3.9
  BOTTOM w0.25: R49.2 35.32,34 33.88,32.56 D48.1
N00105_M_COL14_R-D5: length 3.9
  BOTTOM w0.25: R60.2 35.32,24 33.88,22.56 D59.1
N00105_M_COL14_R-D6: length 3.9
  BOTTOM w0.25: R71.2 35.32,14 33.88,12.56 D70.1
N00105_M_COL14_R-D7: length 3.9
  BOTTOM w0.25: R82.2 35.32,4 33.88,2.56 D81.1
N00105_M_COL15_R-D: length 3.9
  BOTTOM w0.25: R6.2 45.32,74 43.88,72.56 D5.1
N00105_M_COL15_R-D1: length 3.9
  BOTTOM w0.25: R17.2 45.32,64 43.88,62.56 D16.1
N00105_M_COL15_R-D2: length 3.9
  BOTTOM w0.25: R28.2 45.32,54 43.88,52.56 D27.1
N00105_M_COL15_R-D3: length 3.9
  BOTTOM w0.25: D38.1 43.88,42.56 45.32,44 R39.2
N00105_M_COL15_R-D4: length 3.9
  BOTTOM w0.25: D49.1 43.88,32.56 45.32,34 R50.2
N00105_M_COL15_R-D5: length 3.9
  BOTTOM w0.25: D60.1 43.88,22.56 45.32,24 R61.2
N00105_M_COL15_R-D6: length 3.9
  BOTTOM w0.25: D71.1 43.88,12.56 45.32,14 R72.2
N00105_M_COL15_R-D7: length 3.9
  BOTTOM w0.25: D82.1 43.88,2.56 45.32,4 R83.2
N00105_M_COL16_R-D: length 3.9
  BOTTOM w0.25: R7.2 55.32,74 53.88,72.56 D6.1
N00105_M_COL16_R-D1: length 3.9
  BOTTOM w0.25: R18.2 55.32,64 53.88,62.56 D17.1
N00105_M_COL16_R-D2: length 3.9
  BOTTOM w0.25: R29.2 55.32,54 53.88,52.56 D28.1
N00105_M_COL16_R-D3: length 3.9
  BOTTOM w0.25: R40.2 55.32,44 53.88,42.56 D39.1
N00105_M_COL16_R-D4: length 3.9
  BOTTOM w0.25: D50.1 53.88,32.56 55.32,34 R51.2
N00105_M_COL16_R-D5: length 3.9
  BOTTOM w0.25: D61.1 53.88,22.56 55.32,24 R62.2
N00105_M_COL16_R-D6: length 3.9
  BOTTOM w0.25: D72.1 53.88,12.56 55.32,14 R73.2
N00105_M_COL16_R-D7: length 3.9
  BOTTOM w0.25: D83.1 53.88,2.56 55.32,4 R84.2
N00105_M_COL17_R-D: length 3.9
  BOTTOM w0.25: D7.1 63.88,72.56 65.32,74 R8.2
N00105_M_COL17_R-D1: length 3.9
  BOTTOM w0.25: D18.1 63.88,62.56 65.32,64 R19.2
N00105_M_COL17_R-D2: length 3.9
  BOTTOM w0.25: R30.2 65.32,54 63.88,52.56 D29.1
N00105_M_COL17_R-D3: length 3.9
  BOTTOM w0.25: D40.1 63.88,42.56 65.32,44 R41.2
N00105_M_COL17_R-D4: length 3.9
  BOTTOM w0.25: D51.1 63.88,32.56 65.32,34 R52.2
N00105_M_COL17_R-D5: length 3.9
  BOTTOM w0.25: D62.1 63.88,22.56 65.32,24 R63.2
N00105_M_COL17_R-D6: length 3.9
  BOTTOM w0.25: D73.1 63.88,12.56 65.32,14 R74.2
N00105_M_COL17_R-D7: length 3.9
  BOTTOM w0.25: D84.1 63.88,2.56 65.32,4 R85.2
N00105_M_COL18_R-D: length 3.9
  BOTTOM w0.25: D8.1 73.88,72.56 75.32,74 R9.2
N00105_M_COL18_R-D1: length 3.9
  BOTTOM w0.25: D19.1 73.88,62.56 75.32,64 R20.2
N00105_M_COL18_R-D2: length 3.9
  BOTTOM w0.25: D30.1 73.88,52.56 75.32,54 R31.2
N00105_M_COL18_R-D3: length 3.9
  BOTTOM w0.25: D41.1 73.88,42.56 75.32,44 R42.2
N00105_M_COL18_R-D4: length 3.9
  BOTTOM w0.25: R53.2 75.32,34 73.88,32.56 D52.1
N00105_M_COL18_R-D5: length 3.9
  BOTTOM w0.25: R64.2 75.32,24 73.88,22.56 D63.1
N00105_M_COL18_R-D6: length 3.9
  BOTTOM w0.25: R75.2 75.32,14 73.88,12.56 D74.1
N00105_M_COL18_R-D7: length 3.9
  BOTTOM w0.25: D85.1 73.88,2.56 75.32,4 R86.2
N00105_M_COL19_R-D: length 3.9
  BOTTOM w0.25: R10.2 85.32,74 83.88,72.56 D9.1
N00105_M_COL19_R-D1: length 3.9
  BOTTOM w0.25: D20.1 83.88,62.56 85.32,64 R21.2
N00105_M_COL19_R-D2: length 3.9
  BOTTOM w0.25: D31.1 83.88,52.56 85.32,54 R32.2
N00105_M_COL19_R-D3: length 3.9
  BOTTOM w0.25: D42.1 83.88,42.56 85.32,44 R43.2
N00105_M_COL19_R-D4: length 3.9
  BOTTOM w0.25: R54.2 85.32,34 83.88,32.56 D53.1
N00105_M_COL19_R-D5: length 3.9
  BOTTOM w0.25: R65.2 85.32,24 83.88,22.56 D64.1
N00105_M_COL19_R-D6: length 3.9
  BOTTOM w0.25: R76.2 85.32,14 83.88,12.56 D75.1
N00105_M_COL19_R-D7: length 3.9
  BOTTOM w0.25: R87.2 85.32,4 83.88,2.56 D86.1
N00105_M_COL20_R-D: length 3.9
  BOTTOM w0.25: R11.2 95.32,74 93.88,72.56 D10.1
N00105_M_COL20_R-D1: length 3.9
  BOTTOM w0.25: R22.2 95.32,64 93.88,62.56 D21.1
N00105_M_COL20_R-D2: length 3.9
  BOTTOM w0.25: D32.1 93.88,52.56 95.32,54 R33.2
N00105_M_COL20_R-D3: length 3.9
  BOTTOM w0.25: D43.1 93.88,42.56 95.32,44 R44.2
N00105_M_COL20_R-D4: length 3.9
  BOTTOM w0.25: R55.2 95.32,34 93.88,32.56 D54.1
N00105_M_COL20_R-D5: length 3.9
  BOTTOM w0.25: R66.2 95.32,24 93.88,22.56 D65.1
N00105_M_COL20_R-D6: length 3.9
  BOTTOM w0.25: D76.1 93.88,12.56 95.32,14 R77.2
N00105_M_COL20_R-D7: length 3.9
  BOTTOM w0.25: D87.1 93.88,2.56 95.32,4 R88.2
N00105_M_COL_R-D: length 3.9
  BOTTOM w0.25: R2.2 5.32,74 3.88,72.56 D1.1
N00105_M_COL_R-D1: length 3.9
  BOTTOM w0.25: R13.2 5.32,64 3.88,62.56 D12.1
N00105_M_COL_R-D2: length 3.9
  BOTTOM w0.25: D23.1 3.88,52.56 5.32,54 R24.2
N00105_M_COL_R-D3: length 3.9
  BOTTOM w0.25: R35.2 5.32,44 3.88,42.56 D34.1
N00105_M_COL_R-D4: length 3.9
  BOTTOM w0.25: D45.1 3.88,32.56 5.32,34 R46.2
N00105_M_COL_R-D5: length 3.9
  BOTTOM w0.25: R57.2 5.32,24 3.88,22.56 D56.1
N00105_M_COL_R-D6: length 3.9
  BOTTOM w0.25: R68.2 5.32,14 3.88,12.56 D67.1
N00105_M_COL_R-D7: length 3.9
  BOTTOM w0.25: D78.1 3.88,2.56 5.32,4 R79.2
NCS: length 102.4
  TOP w0.25: v1(15,101) 5.25,101 U1.1
  BOTTOM w0.25: v1(15,101) 85,101 88,98 98.12,98 J1.4
SCK: length 102.4
  TOP w0.25: v1(15,100) 6.79,100 U1.2
  BOTTOM w0.25: v1(15,100) 84,100 87,97 99.66,97 J1.5
N18545: length 19.4
  BOTTOM w0.6: J2.2 103.96,91.96 97,85 91.48,85 91.44,85.04 Q1.2
N18549: length 7.4
  BOTTOM w0.6: J1.6 106.7,95.86 106.5,95.66 106.5,94.66 ; 106.5,94.66 J2.1 ; 106.5,94.66 106.7,94.86
N18612: length 12
  TOP w0.25: R1.1 87,89 87,83 87.5,82.5 Q1.1
